# EAGLE board Demo PCB (EAGLE 7.4.0)
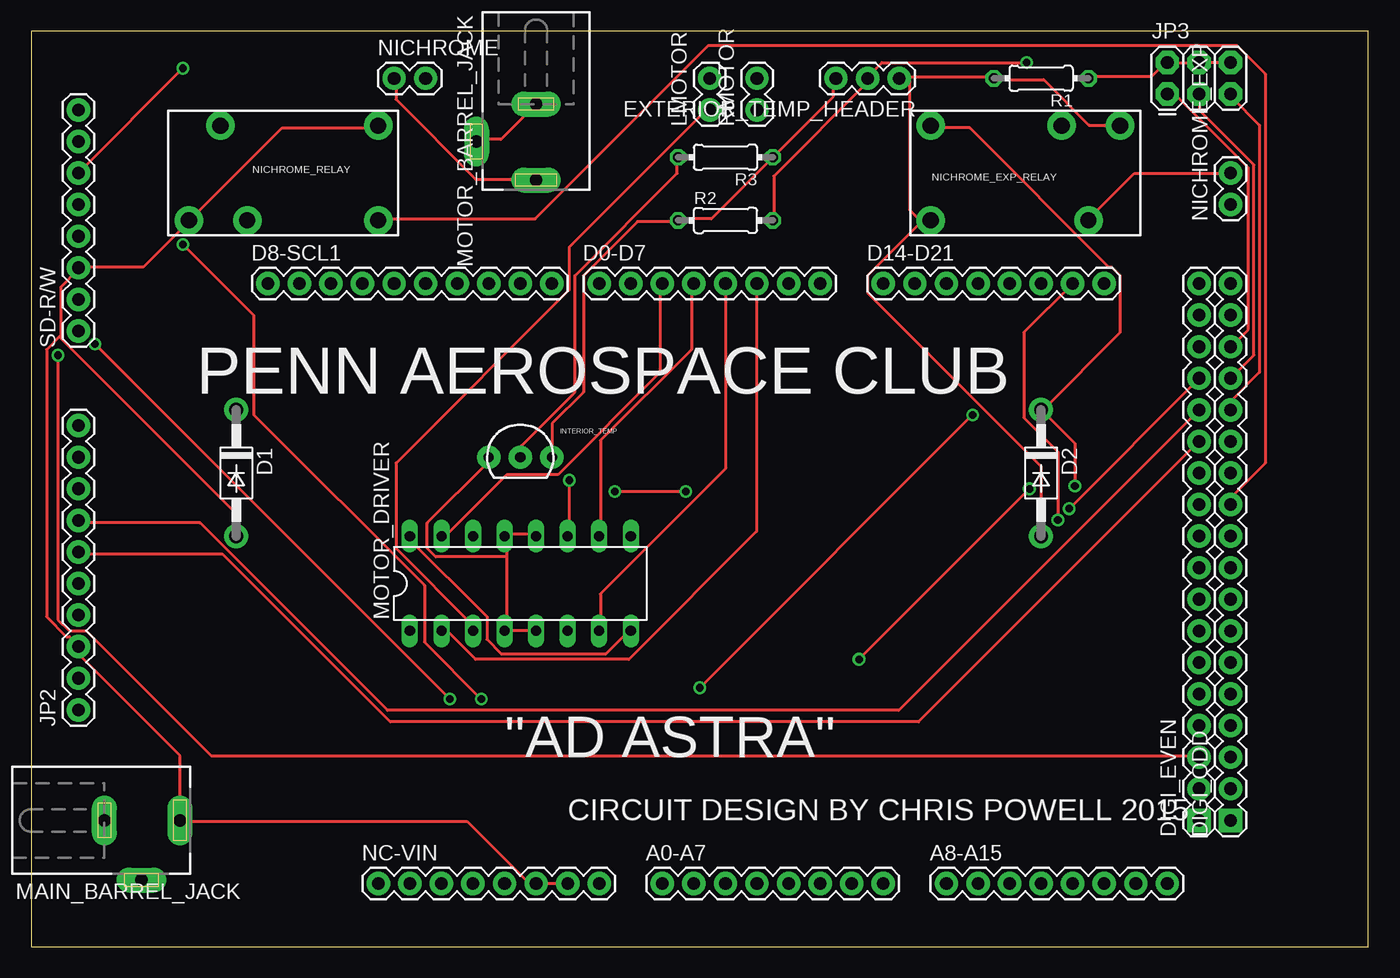
[diagram p0: board, top side]
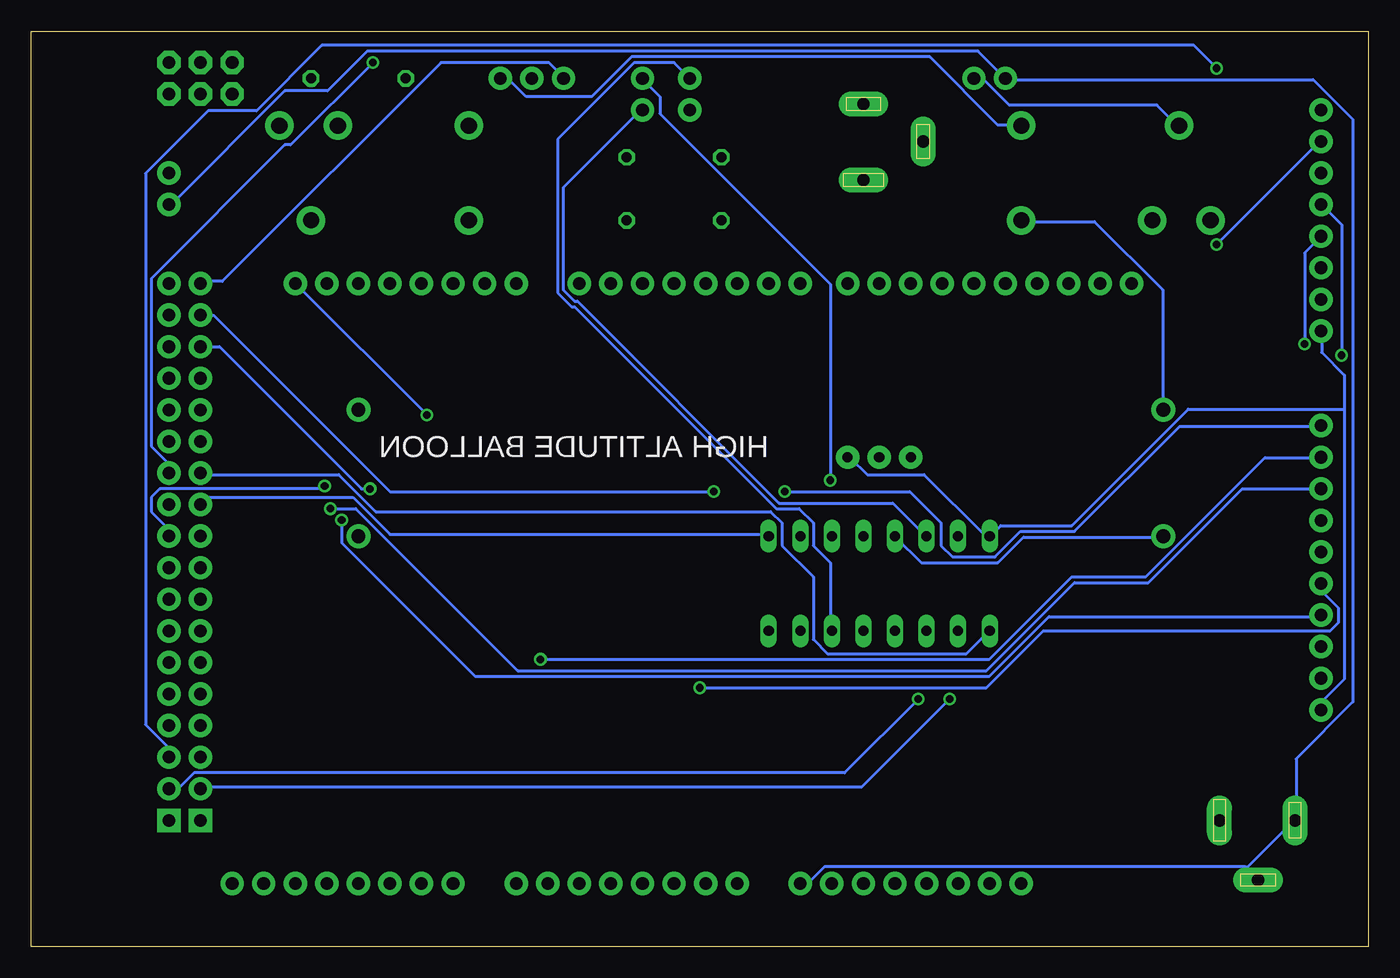
[diagram p1: board, bottom side, seen from below]

Size 107.62 x 73.65 mm. Coordinates in mm from the lower left corner, seen from the top.
Outline: 0,0 107.62,0 107.62,73.65 0,73.65 0,0
Copper layers (1*16): Top 0.035mm / dielectric 1.5mm / Bottom 0.035mm
Design rules "default": minimum track width 10mil, minimum drill 24mil, track to track 8mil, track to pad 8mil, pad to pad 8mil, via to via 8mil, smd to smd 8mil, copper to edge 40mil, drill to drill 8mil, minimum pad ring 10mil, minimum via ring 8mil, stop-mask expansion 4mil, vias tented up to drill 0mil, thermal gap 10mil

## Footprints (pad centres in the part's own frame; a part is rotated, then mirrored left to right if it is on the bottom)
1X08_ROUND = drill 1.016 pad 1.88: 1 0,0; 2 2.54,0; 3 5.08,0; 4 7.62,0; 5 10.16,0; 6 12.7,0; 7 15.24,0; 8 17.78,0
DO41-10 = drill 1.118 pad 1.93: A 5.08,0; C -5.08,0
1X10 = drill 1.016 pad 1.88: 1 0,0; 2 2.54,0; 3 5.08,0; 4 7.62,0; 5 10.16,0; 6 12.7,0; 7 15.24,0; 8 17.78,0; 9 20.32,0; 10 22.86,0
1X18 = drill 1.016 pad 1.88 square: 1 0,0 | drill 1.016 pad 1.88: 2 2.54,0; 3 5.08,0; 4 7.62,0; 5 10.16,0; 6 12.7,0; 7 15.24,0; 8 17.78,0; 9 20.32,0; 10 22.86,0; 11 25.4,0; 12 27.94,0; 13 30.48,0; 14 33.02,0; 15 35.56,0; 16 38.1,0; 17 40.64,0; 18 43.18,0
1X03 = drill 1.016 pad 1.88: 1 0,0; 2 2.54,0; 3 5.08,0
TO-92-AMMO = drill 0.813 pad 1.88: 1 -2.54,0; 2 0,0; 3 2.54,0
2X3 = drill 1.016 pad 1.88 octagon: 1 0,0; 2 0,2.54; 3 2.54,0; 4 2.54,2.54; 5 5.08,0; 6 5.08,2.54
1X02 = drill 1.016 pad 1.88: 1 0,0; 2 2.54,0
DCJ0303 = drill 1 pad 2 long: 1 0,3.1; 2 4.8,0; 3 0,-3
DIL16 = drill 0.813 long: 1 -8.89,-3.81; 2 -6.35,-3.81; 3 -3.81,-3.81; 4 -1.27,-3.81; 5 1.27,-3.81; 6 3.81,-3.81; 7 6.35,-3.81; 8 8.89,-3.81; 9 8.89,3.81; 10 6.35,3.81; 11 3.81,3.81; 12 1.27,3.81; 13 -1.27,3.81; 14 -3.81,3.81; 15 -6.35,3.81; 16 -8.89,3.81
RELAY-JZC = drill 1.3 pad 2.286: 1 3.81,-8.89; 2 -3.81,1.651; 3 -3.81,6.35; 4 3.81,3.81; 5 -3.81,-8.89
0204/7 = drill 0.813 octagon: 1 -3.81,0; 2 3.81,0

## Placement (x,y rotation side)
A0-A7  [1X08_ROUND]  50.8,5.08 0 top
A8-A15  [1X08_ROUND]  73.66,5.08 0 top
D0-D7  [1X08_ROUND]  45.72,53.34 0 top
D1  1N4004  [DO41-10]  16.51,38.1 270 top
D2  1N4004  [DO41-10]  81.28,38.1 270 top
D8-SCL1  [1X10]  19.05,53.34 0 top
D14-D21  [1X08_ROUND]  68.58,53.34 0 top
DIGI_EVEN  [1X18]  93.98,10.16 90 top
DIGI_ODD  [1X18]  96.52,10.16 90 top
EXTERIOR_TEMP_HEADER  [1X03]  69.85,69.85 180 top
INTERIOR_TEMP  DS18B20  [TO-92-AMMO]  39.37,39.37 0 top
JP2  [1X10]  3.81,19.05 90 top
JP3  FEMALE 2x3  [2X3]  91.44,68.58 0 top
LMOTOR  [1X02]  54.61,67.31 90 top
MAIN_BARREL_JACK  [DCJ0303]  8.89,10.16 270 top
MOTOR_BARREL_JACK  [DCJ0303]  40.64,64.77 180 top
MOTOR_DRIVER  SN754410PDIP  [DIL16]  39.37,29.21 0 top
NC-VIN  [1X08_ROUND]  27.94,5.08 0 top
NICHROME  [1X02]  29.21,69.85 0 top
NICHROME_EXP  [1X02]  96.52,59.69 90 top
NICHROME_EXP_RELAY  RELAYPTH4  [RELAY-JZC]  81.28,62.23 270 top
NICHROME_RELAY  RELAYPTH4  [RELAY-JZC]  19.05,62.23 90 top
R1  220Ω  [0204/7]  81.28,69.85 180 top
R2  4.7KΩ  [0204/7]  55.88,58.42 0 top
R3  4.7KΩ  [0204/7]  55.88,63.5 180 top
RMOTOR  [1X02]  58.42,67.31 90 top
SD-R/W  [1X08_ROUND]  3.81,49.53 90 top

## Library data of the parts
A0-A7 A8-A15 D0-D7 D14-D21 DIGI_EVEN DIGI_ODD EXTERIOR_TEMP_HEADER LMOTOR NC-VIN NICHROME NICHROME_EXP RMOTOR SD-R/W = SparkFun-Connectors
D1 D2 = adafruit
D8-SCL1 JP2 = SparkFun-Connectors; PROD_ID: CONN-11563
INTERIOR_TEMP = SparkFun-Sensors; STORE_ID: SEN-00245
JP3 = SparkFun-Connectors; PROD_ID: CONN-11566
MAIN_BARREL_JACK MOTOR_BARREL_JACK = con-jack; OC_FARNELL: unknown; OC_NEWARK: unknown
MOTOR_DRIVER = AlexW-Eagle-Libraries
NICHROME_EXP_RELAY NICHROME_RELAY = SparkFun-Electromechanical
R1-R3 = resistor

## Nets
5V: DIGI_EVEN.18 EXTERIOR_TEMP_HEADER.3 INTERIOR_TEMP.3 JP2.1 MOTOR_DRIVER.8 MOTOR_DRIVER.16 R2.1 R3.1 SD-R/W.1
6V: MAIN_BARREL_JACK.2 MAIN_BARREL_JACK.3 MOTOR_BARREL_JACK.1 NC-VIN.8 NICHROME.1 NICHROME_EXP.1
BLUE_LED: DIGI_ODD.14 JP3.5
EXTERIOR_TEMP: DIGI_ODD.12 EXTERIOR_TEMP_HEADER.2 R2.2
GND: D1.A D2.A EXTERIOR_TEMP_HEADER.1 INTERIOR_TEMP.1 JP2.3 MAIN_BARREL_JACK.1 MOTOR_DRIVER.4 MOTOR_DRIVER.5 MOTOR_DRIVER.12 MOTOR_DRIVER.13 NC-VIN.6 NC-VIN.7 NICHROME_EXP_RELAY.1 NICHROME_EXP_RELAY.3 NICHROME_RELAY.1 NICHROME_RELAY.3 R1.2 SD-R/W.3
GREEN_LED: DIGI_ODD.15 JP3.3
IMU_GINT: DIGI_EVEN.13 JP2.6
IMU_GRDY: DIGI_EVEN.14 JP2.7
IMU_LIN1: DIGI_EVEN.15 JP2.8
IMU_LIN2: DIGI_EVEN.16 JP2.9
IMU_LRDY: DIGI_EVEN.17 JP2.10
IMU_SCL: D14-D21.8 JP2.5
IMU_SDA: D14-D21.7 JP2.4
INTERIOR_TEMP: DIGI_ODD.13
LMOTOR1: D0-D7.6 MOTOR_DRIVER.2
LMOTOR2: D0-D7.5 MOTOR_DRIVER.7
LMOTOR_VCC: DIGI_EVEN.12 MOTOR_DRIVER.1
MOTOR_VCC: MOTOR_BARREL_JACK.2 MOTOR_BARREL_JACK.3
N$1: INTERIOR_TEMP.2 R3.2
N$2: NICHROME_EXP.2 NICHROME_EXP_RELAY.4
N$3: MOTOR_DRIVER.11 RMOTOR.2
N$4: MOTOR_DRIVER.14 RMOTOR.1
N$5: JP3.2 JP3.4 JP3.6 R1.1
N$6: LMOTOR.2 MOTOR_DRIVER.6
N$7: LMOTOR.1 MOTOR_DRIVER.3
N$14: NICHROME.2 NICHROME_RELAY.4
NICHROME: D1.C DIGI_ODD.11 NICHROME_RELAY.5
NICHROME_EXP: D2.C DIGI_ODD.10 NICHROME_EXP_RELAY.5
RED_LED: DIGI_ODD.16 JP3.1
RMOTOR1: D0-D7.4 MOTOR_DRIVER.10
RMOTOR2: D0-D7.3 MOTOR_DRIVER.15
RMOTOR_VCC: DIGI_EVEN.11 MOTOR_DRIVER.9
SD_CLK: DIGI_EVEN.2 SD-R/W.4
SD_CS: DIGI_ODD.2 SD-R/W.7
SD_DI: DIGI_ODD.3 SD-R/W.6
SD_DO: DIGI_EVEN.3 SD-R/W.5

## Tracks (layer width: path | path; a pad name or v marks a point on that pad's centre or on a via)
5V
  Top 0.254: MOTOR_DRIVER.8 48.11,25.4 46.28,23.57 37.82,23.57 36.68,24.71 36.68,26.54 30.28,32.94 MOTOR_DRIVER.16 | EXTERIOR_TEMP_HEADER.3 64.57,69.75 64.57,68.38 R3.1 54.74,58.55 52.22,58.55 R2.1 51.99,58.32 48.79,58.32 44.45,53.98 44.45,44.6 41.93,42.09 41.93,39.57 INTERIOR_TEMP.3
  Bottom 0.254: 1.93,43.23 1.93,45.97 3.76,47.8 3.76,49.4 SD-R/W.1 | 1.93,43.23 1.93,21.51 3.76,19.68 3.76,19.23 JP2.1 | INTERIOR_TEMP.3 41.71,39.34 40.33,37.97 35.76,37.97 30.96,33.17 30.5,33.17 MOTOR_DRIVER.16 30.28,33.17 29.59,33.86 23.88,33.86 14.5,43.23 1.93,43.23 | DIGI_EVEN.18 93.83,53.52 92.23,53.52 74.62,71.12 65.94,71.12 64.8,69.98 EXTERIOR_TEMP_HEADER.3
6V
  Top 0.254: MOTOR_BARREL_JACK.1 40.56,61.75 35.76,61.75 29.36,68.15 29.36,69.75 NICHROME.1
  Bottom 0.254: 9.93,6.43 43.76,6.43 44.91,5.28 45.59,5.28 NC-VIN.8 | 9.93,6.43 9.02,5.51 MAIN_BARREL_JACK.2 | 9.93,6.43 9.7,6.43 6.04,10.08 MAIN_BARREL_JACK.3 5.82,10.31 5.82,15.11 1.25,19.68 1.25,66.55 4.45,69.75 29.13,69.75 NICHROME.1 29.36,69.98 31.42,72.03 80.57,72.03 83.77,68.83 87.2,68.83 96.34,59.69 NICHROME_EXP.1
BLUE_LED
  Top 0.254: DIGI_ODD.14 96.57,43.23 96.57,43.92 98.86,46.2 98.86,66.09 96.57,68.38 JP3.5
EXTERIOR_TEMP  (via drill 0.61)
  Top 0.254: R2.2 59.77,58.55 59.77,61.98 67.31,69.52 EXTERIOR_TEMP_HEADER.2 67.31,69.98 68.45,71.12 v80.11,71.12
  Bottom 0.254: v80.11,71.12 86.74,64.49 87.2,64.49 97.94,53.75 97.94,40.26 96.57,38.89 96.57,38.2 DIGI_ODD.12
GND
  Top 0.254: NC-VIN.7 43.08,5.05 40.79,5.05 NC-VIN.6 40.56,5.28 39.88,5.28 35.08,10.08 12.22,10.08 MAIN_BARREL_JACK.1 11.99,10.31 11.99,15.34 3.99,23.34 3.99,24.03 JP2.3 3.76,24.26 3.07,24.94 2.85,24.94 1.25,26.54 1.25,48.03 2.39,49.17 | 70.74,69.98 70.05,69.98 EXTERIOR_TEMP_HEADER.1 70.74,69.98 | 70.74,69.98 77.37,69.98 R1.2 77.6,69.75 81.48,69.75 85.14,66.09 87.43,66.09 NICHROME_EXP_RELAY.3 | 71.65,58.32 67.31,53.98 67.31,52.6 81.26,38.66 81.26,33.17 D2.A | 71.65,58.32 72.34,58.32 NICHROME_EXP_RELAY.1 71.65,58.32 | 70.74,69.98 70.74,59.23 71.65,58.32 | MOTOR_DRIVER.5 38.28,25.4 | MOTOR_DRIVER.12 40.56,33.17 38.28,33.17 MOTOR_DRIVER.13 38.28,32.94 38.28,31.34 | 38.28,31.34 38.28,25.4 | 38.28,25.4 MOTOR_DRIVER.4 | 38.28,31.34 32.56,31.34 31.88,32.03 31.88,34.09 36.68,38.89 36.68,39.34 INTERIOR_TEMP.1 | NICHROME_RELAY.1 27.76,65.86 20.22,65.86 12.9,58.55 NICHROME_RELAY.3 12.68,58.32 9.02,54.66 3.99,54.66 SD-R/W.3 3.76,54.43 2.39,53.06 2.39,49.17 | 2.39,49.17 2.39,48.95 16.33,35 16.33,33.17 D1.A
  Bottom 0.254: D1.A 16.56,32.94 27.76,32.94 29.82,30.89 35.99,30.89 38.05,32.94 MOTOR_DRIVER.13 | EXTERIOR_TEMP_HEADER.1 69.83,69.75 69.14,69.75 67.77,68.38 62.51,68.38 59.31,71.58 35.31,71.58 29.82,66.09 27.99,66.09 NICHROME_RELAY.1
GREEN_LED
  Top 0.254: JP3.3 94.06,68.38 94.06,67.23 98.4,62.89 98.4,47.57 96.57,45.74 DIGI_ODD.15
IMU_GINT
  Top 0.254: DIGI_EVEN.13 71.42,18.09 28.91,18.09 15.42,31.57 3.99,31.57 JP2.6
IMU_GRDY
  Top 0.254: JP2.7 3.99,34.09 13.59,34.09 28.68,19 69.83,19 93.83,43 DIGI_EVEN.14
IMU_LIN1  (via drill 0.61)
  Top 0.254: v83.54,35.23 93.83,45.52 DIGI_EVEN.15
  Bottom 0.254: JP2.8 10.16,36.83 17.7,29.29 23.65,29.29 30.73,22.2 68.45,22.2 81.48,35.23 v83.54,35.23
IMU_LIN2  (via drill 0.61)
  Top 0.254: v80.34,36.83 v66.62,23.11
  Bottom 0.254: v66.62,23.11 30.5,23.11 23.88,29.74 17.93,29.74 8.33,39.34 3.99,39.34 JP2.9 | v80.34,36.83 81.03,36.83 92.46,48.26 DIGI_EVEN.16
IMU_LRDY  (via drill 0.61)
  Top 0.254: v52.68,36.6 v46.96,36.6
  Bottom 0.254: v46.96,36.6 36.91,36.6 34.39,34.09 34.39,32.26 33.48,31.34 30.05,31.34 27.99,33.4 23.65,33.4 15.19,41.86 3.99,41.86 JP2.10 | v52.68,36.6 78.74,36.6 92.91,50.77 93.83,50.77 DIGI_EVEN.17
IMU_SCL  (via drill 0.61)
  Top 0.254: v75.77,42.77 v53.82,20.83
  Bottom 0.254: v53.82,20.83 30.73,20.83 26.16,25.4 3.07,25.4 2.39,26.09 2.39,27.23 3.76,28.6 3.76,29.06 JP2.5 | v75.77,42.77 86.28,53.29 D14-D21.8
IMU_SDA  (via drill 0.61)
  Top 0.254: v82.63,34.31 82.63,39.8 79.88,42.55 79.88,49.4 D14-D21.7
  Bottom 0.254: v82.63,34.31 82.63,32.49 71.88,21.74 30.5,21.74 25.71,26.54 3.99,26.54 JP2.4
LMOTOR1
  Top 0.254: MOTOR_DRIVER.2 33.48,25.4 35.76,23.11 48.11,23.11 58.39,33.4 58.39,53.29 D0-D7.6
LMOTOR2
  Top 0.254: D0-D7.5 55.88,38.43 45.82,28.37 45.82,25.4 MOTOR_DRIVER.7
LMOTOR_VCC
  Bottom 0.254: MOTOR_DRIVER.1 30.5,25.4 32.33,23.57 43.54,23.57 44.68,24.71 44.68,29.74 47.19,32.26 47.19,34.09 48.11,35 79.88,35 82.86,37.97 93.83,37.97 DIGI_EVEN.12
MOTOR_VCC
  Top 0.254: MOTOR_BARREL_JACK.2 35.99,64.95 37.82,64.95 40.56,67.69 MOTOR_BARREL_JACK.3
N$1
  Top 0.254: R3.2 51.99,63.35 51.99,62.2 43.76,53.98 43.76,44.6 39.42,40.26 39.42,39.57 INTERIOR_TEMP.2
N$2
  Top 0.254: NICHROME_EXP.2 96.34,62.2 88.8,62.2 85.14,58.55 NICHROME_EXP_RELAY.4
N$3  (via drill 0.61)
  Top 0.254: v43.31,37.52 43.31,33.17 MOTOR_DRIVER.11
  Bottom 0.254: v43.31,37.52 43.31,53.29 57.02,67.01 57.02,68.38 58.39,69.75 RMOTOR.2
N$4
  Bottom 0.254: MOTOR_DRIVER.14 35.76,33.17 38.28,35.69 47.42,35.69 63.65,51.92 63.88,51.92 64.8,52.83 64.8,61.06 58.62,67.23 RMOTOR.1
N$5
  Top 0.254: JP3.6 JP3.4 JP3.2 91.31,71.12 90.17,69.98 85.14,69.98 R1.1
N$6
  Bottom 0.254: LMOTOR.2 55.88,71.12 59.08,71.12 65.25,64.95 65.25,52.6 64.11,51.46 63.88,51.46 47.65,35.23 45.82,35.23 44.68,34.09 44.68,32.26 43.31,30.89 43.31,25.4 MOTOR_DRIVER.6
N$7
  Top 0.254: MOTOR_DRIVER.3 35.53,25.4 35.53,25.86 29.36,32.03 29.36,38.89 43.31,52.83 43.31,56.26 54.51,67.46 LMOTOR.1
N$14
  Bottom 0.254: NICHROME.2 31.65,69.75 30.96,69.75 28.91,67.69 17.02,67.69 15.42,66.09 NICHROME_RELAY.4
NICHROME
  Top 0.254: DIGI_ODD.11 96.57,35.69 96.57,36.14 99.31,38.89 99.31,70.21 97.03,72.49 54.51,72.49 40.56,58.55 27.99,58.55 NICHROME_RELAY.5
  Bottom 0.254: D1.C 16.56,43.23 16.56,52.83 22.05,58.32 27.76,58.32 NICHROME_RELAY.5
NICHROME_EXP  (via drill 0.61)
  Top 0.254: v84,37.06 84,40.49 81.48,43 D2.C 81.48,43.23 87.66,49.4 87.66,53.98 86.97,54.66 86.74,54.66 75.54,65.86 72.57,65.86 NICHROME_EXP_RELAY.5
  Bottom 0.254: v84,37.06 84.23,36.83 97.26,36.83 97.94,36.14 97.94,35 96.57,33.63 96.57,33.17 DIGI_ODD.10
RED_LED
  Top 0.254: JP3.1 91.54,68.38 92.23,68.38 97.94,62.66 97.94,49.63 96.57,48.26 DIGI_ODD.16
RMOTOR1
  Top 0.254: MOTOR_DRIVER.10 45.82,33.17 45.82,40.72 53.14,48.03 53.14,53.29 D0-D7.4
RMOTOR2
  Top 0.254: MOTOR_DRIVER.15 33.02,33.17 33.48,33.17 38.28,37.97 42.39,37.97 50.62,46.2 50.62,53.29 D0-D7.3
RMOTOR_VCC
  Bottom 0.254: MOTOR_DRIVER.9 48.34,33.17 78.74,33.17 81.71,36.14 93.37,36.14 93.83,35.69 DIGI_EVEN.11
SD_CLK  (via drill 0.61)
  Top 0.254: v5.13,48.49 v33.71,19.91
  Bottom 0.254: v33.71,19.91 40.79,12.83 93.83,12.83 DIGI_EVEN.2 | v5.13,48.49 5.13,55.8 3.99,56.95 SD-R/W.4
SD_CS  (via drill 0.61)
  Top 0.254: v36.22,19.91 31.65,24.49 31.65,29.06 17.93,42.77 17.93,50.77 v12.22,56.49
  Bottom 0.254: v36.22,19.91 42.16,13.97 94.51,13.97 95.66,12.83 96.34,12.83 DIGI_ODD.2 | v12.22,56.49 3.99,64.72 SD-R/W.7
SD_DI  (via drill 0.61)
  Top 0.254: v12.22,70.66 3.99,62.43 SD-R/W.6
  Bottom 0.254: v12.22,70.66 14.05,72.49 84.23,72.49 89.48,67.23 93.37,67.23 98.4,62.2 98.4,17.86 96.57,16.03 96.57,15.34 DIGI_ODD.3
SD_DO  (via drill 0.61)
  Top 0.254: v2.16,47.57 2.16,26.31 3.07,25.4 4.45,25.4 14.5,15.34 93.83,15.34 DIGI_EVEN.3
  Bottom 0.254: v2.16,47.57 2.16,58.09 3.76,59.69 SD-R/W.5

## Text on the board
tPlace: PENN AEROSPACE CLUB | "AD ASTRA" | CIRCUIT DESIGN BY CHRIS POWELL 2015
bPlace: HIGH ALTITUDE BALLOON